# EAGLE board SchaltplanV1 (EAGLE 7.1.0)
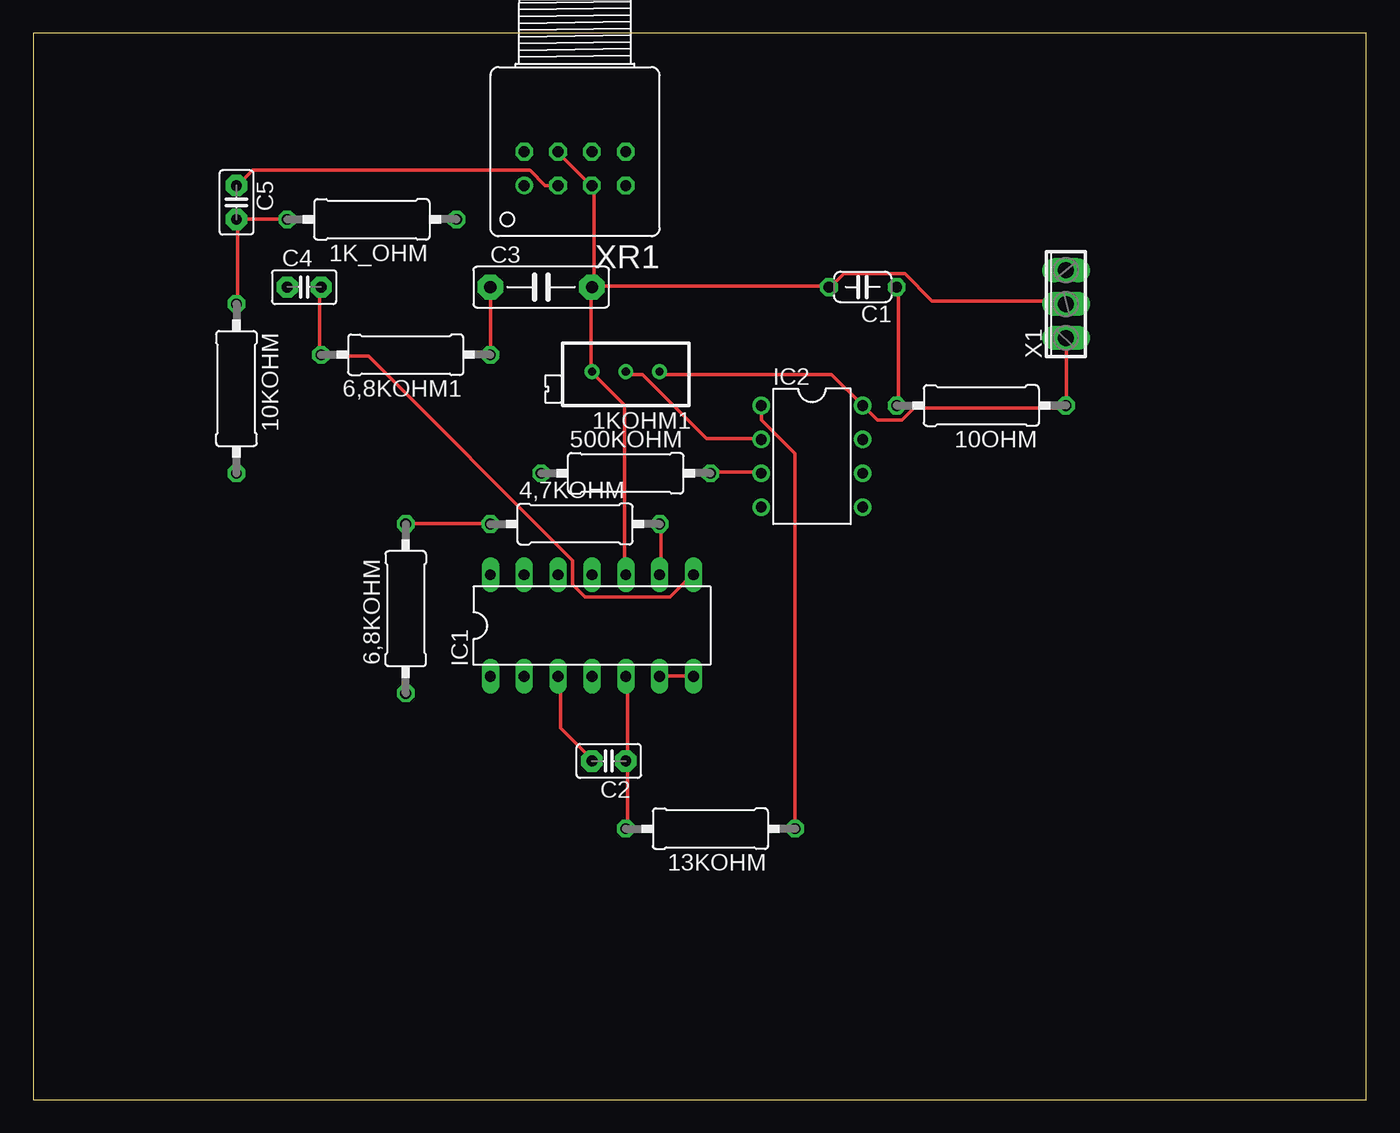
[diagram p0: board, top side]
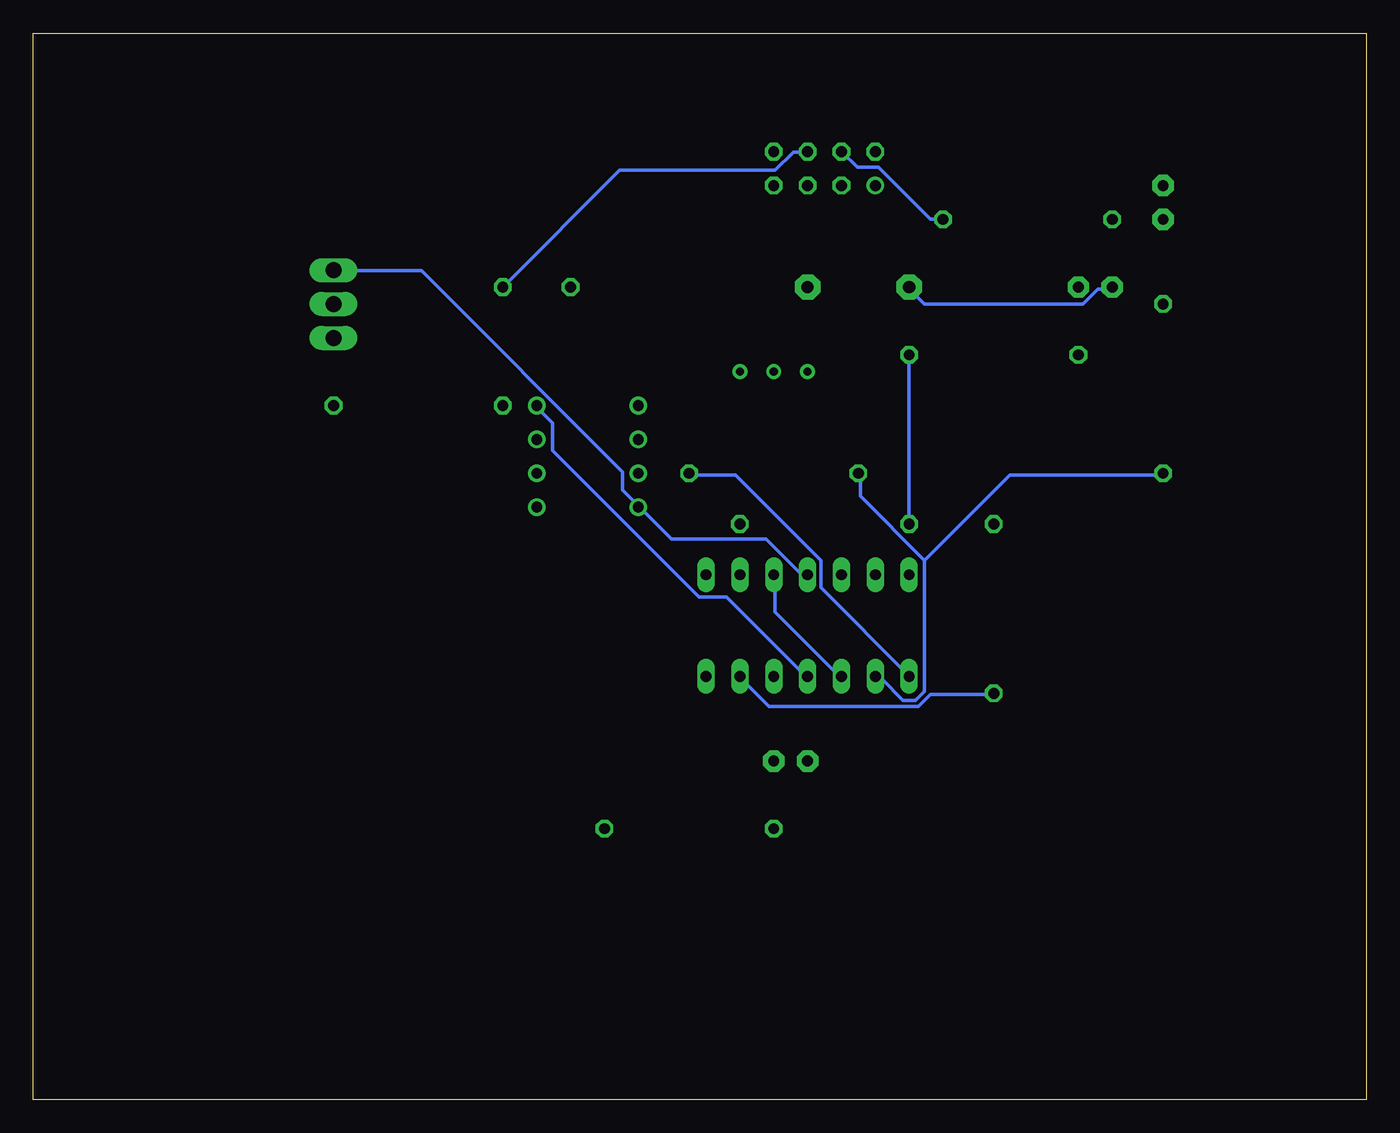
[diagram p1: board, bottom side, seen from below]

Size 100 x 80 mm. Coordinates in mm from the lower left corner, seen from the top.
Outline: 0,0 100,0 100,80 0,80 0,0
Copper layers (1*16): Top 0.035mm / dielectric 1.5mm / Bottom 0.035mm
Design rules "default": minimum track width 10mil, minimum drill 24mil, track to track 8mil, track to pad 8mil, pad to pad 8mil, via to via 8mil, smd to smd 8mil, copper to edge 40mil, drill to drill 8mil, minimum pad ring 10mil, minimum via ring 8mil, stop-mask expansion 4mil, vias tented up to drill 0mil, thermal gap 10mil

## Footprints (pad centres in the part's own frame; a part is rotated, then mirrored left to right if it is on the bottom)
0309/12 = drill 0.813 octagon: 1 -6.35,0; 2 6.35,0
RTRIMT93XA = drill 0.61: 1 0,-2.54; 2 0,0; 3 0,2.54
C050-024X044 = drill 0.813 octagon: 1 -2.54,0; 2 2.54,0
C2.5-2 = drill 0.813 pad 1.6 octagon: 1 -1.27,0; 2 1.27,0
C7.5B3 = drill 0.914 pad 1.905 octagon: 1 -3.81,0; 2 3.81,0
DIL14 = drill 0.813 long: 1 -7.62,-3.81; 2 -5.08,-3.81; 3 -2.54,-3.81; 4 0,-3.81; 5 2.54,-3.81; 6 5.08,-3.81; 7 7.62,-3.81; 8 7.62,3.81; 9 5.08,3.81; 10 2.54,3.81; 11 0,3.81; 12 -2.54,3.81; 13 -5.08,3.81; 14 -7.62,3.81
DIL08 = drill 0.813 pad 1.27: 1 -3.81,-3.81; 2 -1.27,-3.81; 3 1.27,-3.81; 4 3.81,-3.81; 5 3.81,3.81; 6 1.27,3.81; 7 -1.27,3.81; 8 -3.81,3.81
3POL254 = drill 1.2 long: 1 -2.54,0; 2 0,0; 3 2.54,0
HFBR-X41XT = drill 0.813: 1 3.81,2.54 | drill 0.813 octagon: 2 1.27,2.54; 3 -1.27,2.54; 4 -3.81,2.54; 5 -3.81,0; 6 -1.27,0; 7 1.27,0; 8 3.81,0

## Placement (x,y rotation side)
1K_OHM  1000  [0309/12]  25.4,66.04 180 top
1KOHM1  1000  [RTRIMT93XA]  44.45,54.61 90 top
4,7KOHM  4700  [0309/12]  40.64,43.18 0 top
6,8KOHM  6800  [0309/12]  27.94,36.83 90 top
6,8KOHM1  6800  [0309/12]  27.94,55.88 180 top
10KOHM  10000  [0309/12]  15.24,53.34 270 top
10OHM  10  [0309/12]  71.12,52.07 180 top
13KOHM  13000  [0309/12]  50.8,20.32 180 top
500KOHM  500000  [0309/12]  44.45,46.99 0 top
C1  22pF  [C050-024X044]  62.23,60.96 180 top
C2  100nF  [C2.5-2]  43.18,25.4 180 top
C3  1µF  [C7.5B3]  38.1,60.96 0 top
C4  100nF  [C2.5-2]  20.32,60.96 0 top
C5  100nF  [C2.5-2]  15.24,67.31 270 top
IC1  LM324N  [DIL14]  41.91,35.56 0 top
IC2  LM393N  [DIL08]  58.42,48.26 270 top
X1  +5V,0V,-5V  [3POL254]  77.47,59.69 90 top
XR1  HFBR-2412T  [HFBR-X41XT]  40.64,71.12 180 top

## Library data of the parts
1K_OHM 4,7KOHM 6,8KOHM 6,8KOHM1 10KOHM 10OHM 13KOHM 500KOHM = resistor; SPICEPREFIX: R
1KOHM1 = resistor
C1 = rcl
C2-C5 = capacitor-wima
IC1 IC2 = linear
X1 = con-phoenix-254; OC_FARNELL: unknown; OC_NEWARK: unknown
XR1 = RecieverDiode; MF: AGILENT TECHNOLOGIES; MPN: HFBR-2412T; OC_FARNELL: 1247650; OC_NEWARK: 06F6075

## Nets
GND: 1K_OHM.1 1KOHM1.3 C1.2 C2.2 C3.2 IC1.3 IC1.10 X1.2 XR1.3 XR1.7
N$1: 4,7KOHM.1 6,8KOHM1.1 6,8KOHM.2 C3.1 C4.1
N$2: 4,7KOHM.2 IC1.9
N$3: C5.1 XR1.2
N$4: 10OHM.2 C1.1 XR1.6
N$5: 1K_OHM.2 10KOHM.1 C5.2
N$6: 500KOHM.2 IC1.1 IC2.3
N$7: 1KOHM1.2 IC2.2
N$8: 13KOHM.1 IC2.1
N$9: 10KOHM.2 500KOHM.1 IC1.2
N$10: 13KOHM.2 C2.1 IC1.5
N$11: 6,8KOHM.1 IC1.6 IC1.7
N$13: 6,8KOHM1.2 C4.2 IC1.8
V+: 1KOHM1.1 10OHM.1 IC1.4 IC2.8 X1.1
V-: IC1.11 IC2.4 X1.3

## Tracks (layer width: path | path; a pad name or v marks a point on that pad's centre or on a via)
GND
  Top 0.254: IC1.3 39.55,31.55 39.55,27.89 41.83,25.6 C2.2 | XR1.7 39.32,71.09 41.83,68.58 XR1.3 42.06,68.58 42.06,61.04 | 42.06,61.04 59.66,61.04 C1.2 59.89,61.04 60.81,61.95 65.38,61.95 67.44,59.89 77.27,59.89 X1.2 | 42.06,61.04 C3.2 41.83,60.81 41.83,54.63 1KOHM1.3 42.06,54.41 44.35,52.12 44.35,39.55 IC1.10
  Bottom 0.254: IC1.10 44.35,39.32 44.35,36.58 39.55,31.77 IC1.3 | 1K_OHM.1 31.77,66.06 32.69,66.06 36.58,69.95 38.18,69.95 39.32,71.09 XR1.7
N$1
  Top 0.254: 6,8KOHM.2 28.12,43.2 34.29,43.2 4,7KOHM.1 | C3.1 6,8KOHM1.1
  Bottom 0.254: C4.1 19.2,60.81 20.12,60.81 21.26,59.66 33.15,59.66 34.29,60.81 C3.1 | 6,8KOHM1.1 4,7KOHM.1
N$2
  Top 0.254: IC1.9 47.09,39.55 47.09,42.98 4,7KOHM.2
N$3
  Top 0.254: XR1.2 38.41,68.58 37.26,69.72 16.46,69.72 15.32,68.58 C5.1
N$4
  Top 0.254: 10OHM.2 64.92,52.12 64.92,60.81 C1.1
  Bottom 0.254: C1.1 56.01,69.72 44.35,69.72 42.98,71.09 42.06,71.09 XR1.6
N$5
  Top 0.254: 10KOHM.1 15.32,59.89 15.32,65.84 C5.2 15.32,66.06 18.97,66.06 1K_OHM.2
N$6
  Top 0.254: IC2.3 54.41,47.09 50.98,47.09 500KOHM.2
  Bottom 0.254: IC1.1 34.29,31.77 40.92,38.41 40.92,40.46 47.32,46.86 50.75,46.86 500KOHM.2
N$7
  Top 0.254: 1KOHM1.2 44.58,54.41 45.72,54.41 50.52,49.61 54.41,49.61 IC2.2
N$8
  Top 0.254: 13KOHM.1 57.15,48.46 54.63,50.98 54.63,51.89 IC2.1
N$9
  Bottom 0.254: 33.15,40.46 33.15,30.63 33.83,29.95 34.75,29.95 36.35,31.55 36.8,31.55 IC1.2 | 33.15,40.46 37.95,45.26 37.95,46.86 500KOHM.1 | 33.15,40.46 26.75,46.86 15.32,46.86 10KOHM.2
N$10
  Top 0.254: 13KOHM.2 44.58,20.34 44.58,25.38 C2.1 44.58,25.6 44.58,31.55 IC1.5
N$11
  Top 0.254: IC1.7 49.38,31.77 47.09,31.77 IC1.6
  Bottom 0.254: 6,8KOHM.1 28.12,30.4 32.69,30.4 33.6,29.49 44.81,29.49 46.86,31.55 IC1.6
N$13
  Top 0.254: IC1.8 49.38,39.32 47.78,37.72 41.38,37.72 40.46,38.63 40.46,40.46 25.15,55.78 21.72,55.78 6,8KOHM1.2 21.49,56.01 21.49,60.81 C4.2
V+
  Top 0.254: X1.1 77.5,57.15 77.5,52.12 10OHM.1 77.27,51.89 66.06,51.89 65.15,50.98 63.32,50.98 IC2.8 59.89,54.41 47.09,54.41 1KOHM1.1
  Bottom 0.254: IC1.4 42.06,31.77 48.01,37.72 50.06,37.72 61.04,48.69 61.04,50.75 62.18,51.89 IC2.8
V-
  Bottom 0.254: IC1.11 42.06,39.55 42.52,39.55 45.03,42.06 52.12,42.06 54.41,44.35 IC2.4 54.63,44.58 55.78,45.72 55.78,47.09 70.87,62.18 77.27,62.18 X1.3